# EAGLE board Esquemático-bottom (EAGLE 9.4.1)
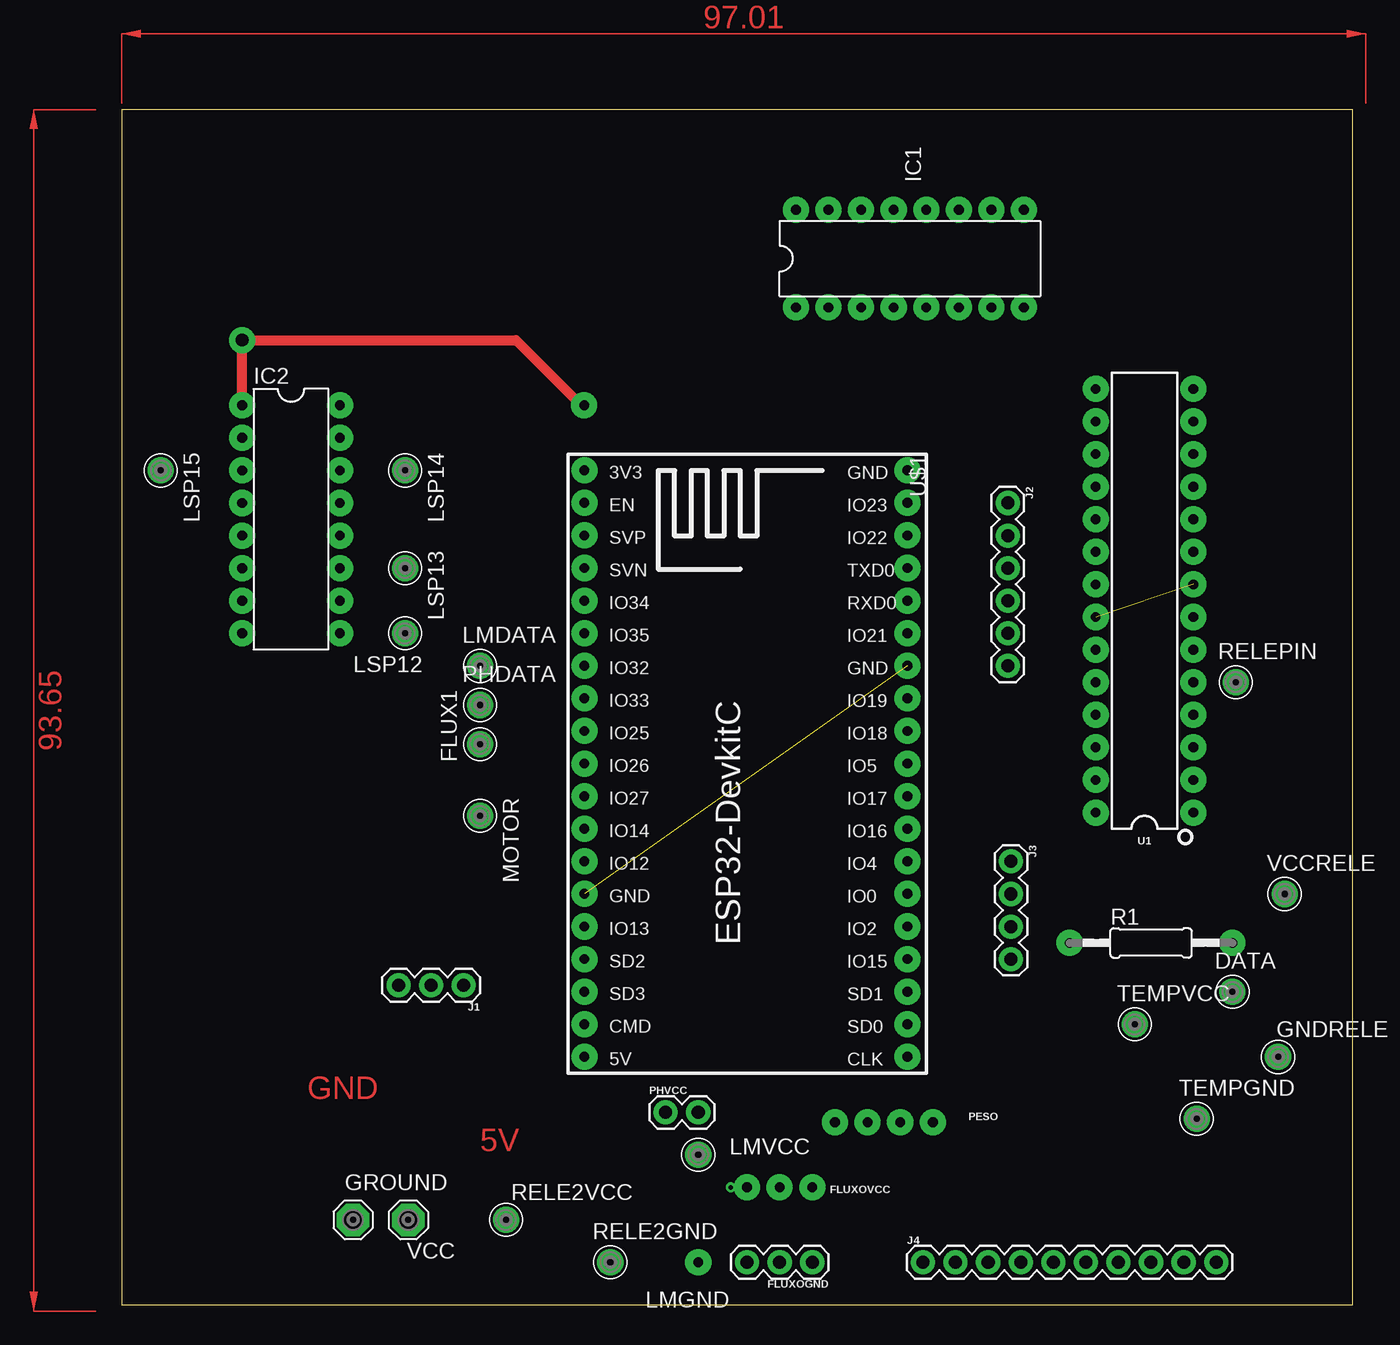
[diagram p0: board, top side]
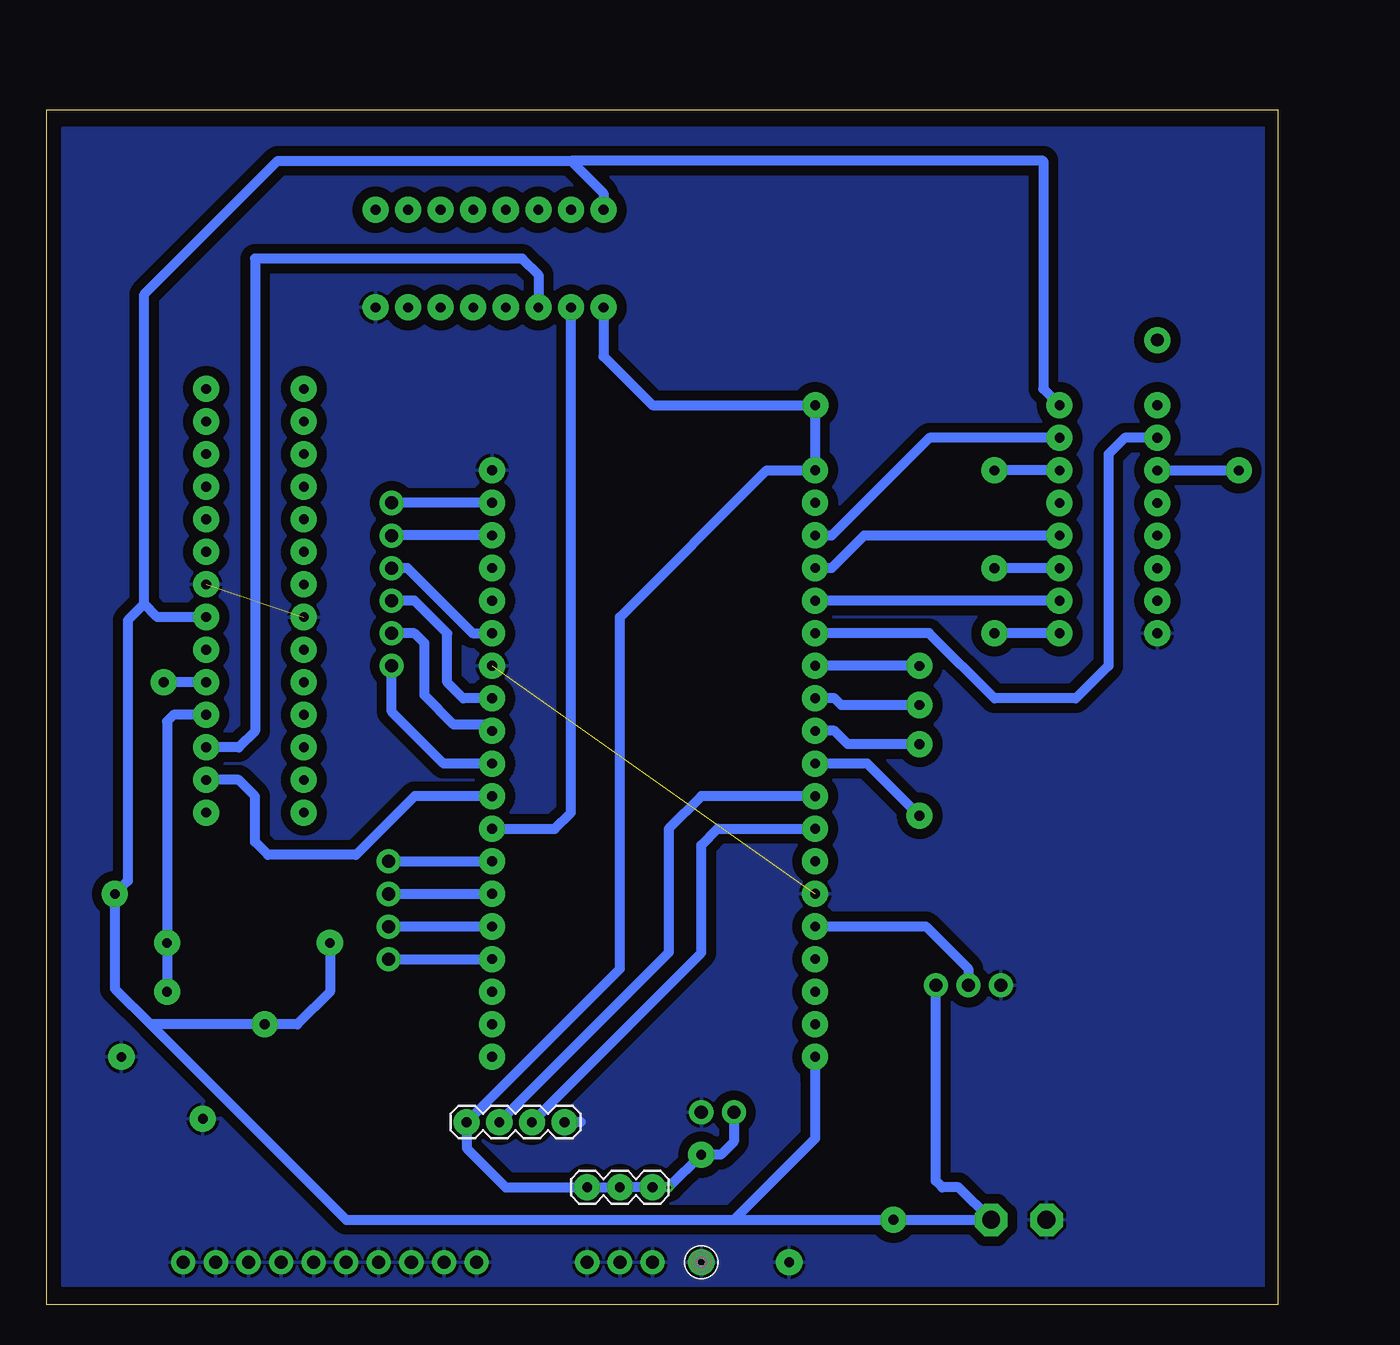
[diagram p1: board, bottom side, seen from below]

Size 95.99 x 93.14 mm. Coordinates in mm from the lower left corner, seen from the top.
Outline: 0,0 95.99,0 95.99,93.14 0,93.14 0,0
Copper layers (1*16): Top 0.035mm / dielectric 1.5mm / Bottom 0.035mm
Design rules "default *": minimum track width 30mil, minimum drill 0.35mm, track to track 6mil, track to pad 6mil, pad to pad 6mil, via to via 6mil, smd to smd 6mil, copper to edge 40mil, drill to drill 6mil, minimum pad ring 10mil, minimum via ring 8mil, stop-mask expansion 4mil, vias tented up to drill 0mil, thermal gap 10mil

## Footprints (pad centres in the part's own frame; a part is rotated, then mirrored left to right if it is on the bottom)
SE14 = drill 0.762 pad 2.032: MP 0,0
1X03 = drill 1.016 pad 1.88: 1 0,0; 2 2.54,0; 3 5.08,0
1X03' = drill 0.762 pad 2.032: 1 0,0; 2 2.54,0; 3 5.08,0
SE14' = drill 1.397 pad 2.54 octagon: MP 0,0
DIL16 = drill 0.762 pad 2.032: 1 -8.89,-3.81; 2 -6.35,-3.81; 3 -3.81,-3.81; 4 -1.27,-3.81; 5 1.27,-3.81; 6 3.81,-3.81; 7 6.35,-3.81; 8 8.89,-3.81; 9 8.89,3.81; 10 6.35,3.81; 11 3.81,3.81; 12 1.27,3.81; 13 -1.27,3.81; 14 -3.81,3.81; 15 -6.35,3.81; 16 -8.89,3.81
1X06 = drill 1.016 pad 1.88: 1 0,0; 2 2.54,0; 3 5.08,0; 4 7.62,0; 5 10.16,0; 6 12.7,0
1X04 = drill 1.016 pad 1.88: 1 0,0; 2 2.54,0; 3 5.08,0; 4 7.62,0
1X10 = drill 1.016 pad 1.88: 1 0,0; 2 2.54,0; 3 5.08,0; 4 7.62,0; 5 10.16,0; 6 12.7,0; 7 15.24,0; 8 17.78,0; 9 20.32,0; 10 22.86,0
1X04' = drill 0.762 pad 2.032: 1 0,0; 2 2.54,0; 3 5.08,0; 4 7.62,0
1X02 = drill 1.016 pad 1.88: 1 0,0; 2 2.54,0
0207/12 = drill 0.762 pad 2.032: 1 -6.35,0; 2 6.35,0
DIP28 = drill 0.762 pad 2.032: 1 -16.51,-3.81; 2 -13.97,-3.81; 3 -11.43,-3.81; 4 -8.89,-3.81; 5 -6.35,-3.81; 6 -3.81,-3.81; 7 -1.27,-3.81; 8 1.27,-3.81; 9 3.81,-3.81; 10 6.35,-3.81; 11 8.89,-3.81; 12 11.43,-3.81; 13 13.97,-3.81; 14 16.51,-3.81; 15 16.51,3.81; 16 13.97,3.81; 17 11.43,3.81; 18 8.89,3.81; 19 6.35,3.81; 20 3.81,3.81; 21 1.27,3.81; 22 -1.27,3.81; 23 -3.81,3.81; 24 -6.35,3.81; 25 -8.89,3.81; 26 -11.43,3.81; 27 -13.97,3.81; 28 -16.51,3.81
ESP32-DEVKITC = drill 0.762 pad 2.032: 1 -22.87,-11.42; 2 -20.33,-11.42; 3 -17.79,-11.42; 4 -15.25,-11.42; 5 -12.71,-11.42; 6 -10.17,-11.42; 7 -7.63,-11.42; 8 -5.09,-11.42; 9 -2.55,-11.42; 10 -0.01,-11.42; 11 2.53,-11.42; 12 5.07,-11.42; 13 7.61,-11.42; 14 10.15,-11.42; 15 12.69,-11.42; 16 15.23,-11.42; 17 17.77,-11.42; 18 20.31,-11.42; 19 22.85,-11.42; 20 22.85,13.77; 21 20.31,13.77; 22 17.77,13.77; 23 15.23,13.77; 24 12.69,13.77; 25 10.15,13.77; 26 7.61,13.77; 27 5.07,13.77; 28 2.53,13.77; 29 -0.01,13.77; 30 -2.55,13.77; 31 -5.09,13.77; 32 -7.63,13.77; 33 -10.17,13.77; 34 -12.71,13.77; 35 -15.25,13.77; 36 -17.79,13.77; 37 -20.33,13.77; 38 -22.87,13.77

## Placement (x,y rotation side)
DATA  SE14  [SE14]  86.61,24.38 0 top
FLUX1  SE14  [SE14]  27.94,43.69 90 top
FLUXOGND  [1X03]  53.85,3.3 180 top
FLUXOVCC  [1X03']  53.85,9.14 0 bottom
GNDRELE  SE14  [SE14]  90.17,19.3 0 top
GROUND  SE14  [SE14']  18.03,6.6 0 top
IC1  4010N  [DIL16]  61.47,81.53 0 top
IC2  4010N  [DIL16]  13.21,61.21 270 top
J1  [1X03]  26.67,24.89 180 top
J2  [1X06]  69.09,62.48 270 top
J3  [1X04]  69.34,34.54 270 top
J4  [1X10]  62.48,3.3 0 top
LMDATA  SE14  [SE14]  27.94,49.78 0 top
LMGND  SE14  [SE14]  44.96,3.3 0 bottom
LMVCC  SE14  [SE14]  44.96,11.68 0 top
LSP12  SE14  [SE14]  22.1,52.32 180 top
LSP13  SE14  [SE14]  22.1,57.4 270 top
LSP14  SE14  [SE14]  22.1,65.02 270 top
LSP15  SE14  [SE14]  3.05,65.02 270 top
MOTOR  SE14  [SE14]  27.94,38.1 270 top
PESO  [1X04']  63.25,14.22 0 bottom
PHDATA  SE14  [SE14]  27.94,46.74 0 top
PHVCC  [1X02]  42.42,14.99 0 top
R1  [0207/12]  80.26,28.19 0 top
RELE2GND  SE14  [SE14]  38.1,3.3 0 top
RELE2VCC  SE14  [SE14]  29.97,6.6 0 top
RELEPIN  SE14  [SE14]  86.87,48.51 0 top
TEMPGND  SE14  [SE14]  83.82,14.48 0 top
TEMPVCC  SE14  [SE14]  78.99,21.84 0 top
U1  328P  [DIP28]  79.76,54.86 90 top
U$1  ESP32DEVKITC  [ESP32-DEVKITC]  47.5,42.16 270 top
VCC  SE14  [SE14']  22.35,6.6 0 top
VCCRELE  SE14  [SE14]  90.68,32 0 top

## Library data of the parts
DATA FLUX1 GNDRELE LMDATA LMGND LMVCC LSP12-LSP15 MOTOR PHDATA RELE2GND RELE2VCC RELEPIN TEMPGND TEMPVCC VCCRELE = solpad-pad
FLUXOGND J1 PHVCC = SparkFun-Connectors
FLUXOVCC = SparkFun-Connectors-pad
GROUND VCC = solpad
IC1 IC2 = 40xx-pad
J2 = SparkFun-Connectors; PROD_ID: CONN-08437
J3 = SparkFun-Connectors; PROD_ID: CONN-09696
J4 = SparkFun-Connectors; PROD_ID: CONN-11563
PESO = SparkFun-Connectors-pad2; PROD_ID: CONN-09696
R1 = resistor-pad
U1 = SparkFun-IC-Microcontroller-pad; PROD_ID: IC-09136
U$1 = ESP32-DEVKITC-pad

## Nets
3.3V: FLUXOVCC.1 FLUXOVCC.2 FLUXOVCC.3 IC1.1 IC2.1 LMVCC.MP PESO.1 PHVCC.1 U$1.1
5V: IC1.16 IC2.16 J1.1 R1.1 RELE2VCC.MP TEMPVCC.MP U1.7 U$1.19 VCC.MP VCCRELE.MP
ECHO0: IC2.9 LSP12.MP
ECHO1: IC2.11 LSP13.MP
ECHO2: IC2.14 LSP14.MP
ECHO3: IC2.3 LSP15.MP
GND: FLUXOGND.1 FLUXOGND.2 FLUXOGND.3 GNDRELE.MP GROUND.MP IC1.8 IC2.8 J1.3 J4.1 J4.2 J4.3 J4.4 J4.5 J4.6 J4.7 J4.8 J4.9 J4.10 LMGND.MP PESO.4 PHVCC.2 RELE2GND.MP TEMPGND.MP U1.8 U1.22 U$1.14 U$1.32 U$1.38
IO0: J3.2 U$1.25
IO2: J3.3 U$1.24
IO4: J3.1 U$1.26
IO5: J2.6 U$1.29
IO12: U$1.13
IO13: J1.2 U$1.15
IO14: PESO.3 U$1.12
IO15: J3.4 U$1.23
IO18: J2.5 U$1.30
IO19: J2.4 U$1.31
IO21: J2.3 U$1.33
IO22: J2.2 U$1.36
IO23: J2.1 U$1.37
IO25: FLUX1.MP U$1.9
IO26: MOTOR.MP U$1.10
IO27: PESO.2 U$1.11
IO32: LMDATA.MP U$1.7
IO33: PHDATA.MP U$1.8
IO34: IC2.10 U$1.5
IO35: IC2.2 U$1.6
IO36: IC2.15 U$1.3
IO39: IC2.12 U$1.4
N$1: DATA.MP R1.2 U1.4
RELE: RELEPIN.MP U1.5
RX: IC1.2 U$1.27
TX: U1.2 U$1.28
TXD: IC1.3 U1.3

## Tracks (layer width: path | path; a pad name or v marks a point on that pad's centre or on a via)
3.3V  (via drill 0.35, 0.76 pad 2.03, 1 pad 2.03)
  Top 0.762: IC2.1 v9.4,75.18 30.73,75.18 35.81,70.1 v36.07,70.1
  Bottom 0.762: IC1.1 52.58,73.91 48.77,70.1 v36.07,70.1 v36.08,70.09 U$1.1 39.87,65.03 51.31,53.59 51.31,26.16 PESO.1 63.25,12.95 63.25,12.19 60.2,9.14 FLUXOVCC.1 FLUXOVCC.2 FLUXOVCC.3 v47.5,9.14 LMVCC.MP 43.43,11.68 42.42,12.7 PHVCC.1
5V
  Bottom 0.762: 88.39,54.61 89.66,53.34 89.66,33.02 VCCRELE.MP 90.68,24.64 87.88,21.84 | 87.88,21.84 72.64,6.6 42.42,6.6 | 55.12,89.15 77.98,89.15 88.39,78.74 88.39,54.61 | IC1.16 52.58,86.61 55.12,89.15 | 42.42,6.6 36.07,12.95 36.07,17.53 36.08,17.54 U$1.19 | 55.12,89.15 18.29,89.15 18.29,71.37 IC2.16 | R1.1 73.91,24.38 76.45,21.84 TEMPVCC.MP 87.88,21.84 | 88.39,54.61 87.38,53.59 U1.7 | J1.1 26.67,9.65 26.16,9.14 24.89,9.14 VCC.MP RELE2VCC.MP 42.42,6.6
ECHO0
  Bottom 0.762: IC2.9 LSP12.MP
ECHO1
  Bottom 0.762: IC2.11 LSP13.MP
ECHO2
  Bottom 0.762: IC2.14 LSP14.MP
ECHO3
  Bottom 0.762: IC2.3 LSP15.MP
GND  (2 unrouted)
  Bottom 0.762: 54.36,14.22 PESO.4
  pour Bottom (isolate 0.762): 0.76,91.69 0.76,1.52 94.74,1.52 94.74,91.69
IO0
  Bottom 0.762: U$1.25 J3.2
IO2
  Bottom 0.762: U$1.24 J3.3
IO4
  Bottom 0.762: U$1.26 J3.1
IO5
  Bottom 0.762: U$1.29 65.03,42.17 69.09,46.23 J2.6
IO13
  Bottom 0.762: U$1.15 27.44,29.47 24.13,26.16 J1.2
IO14
  Bottom 0.762: PESO.3 44.96,27.43 44.96,35.81 43.68,37.09 U$1.12
IO15
  Bottom 0.762: U$1.23 J3.4
IO18
  Bottom 0.762: U$1.30 61.77,45.21 64.26,45.21 66.55,47.5 66.55,51.56 67.31,52.32 J2.5
IO19
  Bottom 0.762: U$1.31 63.51,47.25 64.77,48.51 64.77,52.32 67.31,54.86 J2.4
IO21
  Bottom 0.762: J2.3 67.86,57.4 62.79,52.33 U$1.33
IO22
  Bottom 0.762: U$1.36 J2.2
IO23
  Bottom 0.762: U$1.37 J2.1
IO25
  Bottom 0.762: FLUX1.MP 33.53,43.69 34.55,44.71 U$1.9
IO26
  Bottom 0.762: U$1.10 32.01,42.17 MOTOR.MP
IO27
  Bottom 0.762: PESO.2 47.5,27.43 47.5,37.08 44.95,39.63 U$1.11
IO32
  Bottom 0.762: 27.95,49.79 LMDATA.MP U$1.7
IO33
  Bottom 0.762: PHDATA.MP 34.04,46.74 34.55,47.25 U$1.8
IO34
  Bottom 0.762: IC2.10 U$1.5
IO35
  Bottom 0.762: IC2.2 11.94,67.56 13.21,66.29 13.21,49.78 15.75,47.24 22.1,47.24 27.19,52.33 U$1.6
IO36
  Bottom 0.762: IC2.15 27.18,67.56 34.8,59.94 U$1.3
IO39
  Bottom 0.762: IC2.12 32.26,59.94 34.8,57.4 U$1.4
N$1
  Bottom 0.762: DATA.MP R1.2 86.61,45.47 86.11,45.97 U1.4
RELE
  Bottom 0.762: U1.5 RELEPIN.MP
RX
  Bottom 0.762: U$1.27 59.99,37.08 56.39,37.08 55.12,38.35 IC1.2
TX
  Bottom 0.762: 62.73,39.63 U$1.28 67.3,39.63 71.88,35.05 78.74,35.05 79.76,36.07 79.76,39.62 81.03,40.89 U1.2
TXD
  Bottom 0.762: IC1.3 57.66,80.26 58.93,81.53 79.76,81.53 79.76,44.7 81.03,43.43 U1.3
(copper drawn outside any net)
  shapes: Top area x2

## Text on the board
Top: GND | 5V